# EAGLE board board (EAGLE 9.6.2)
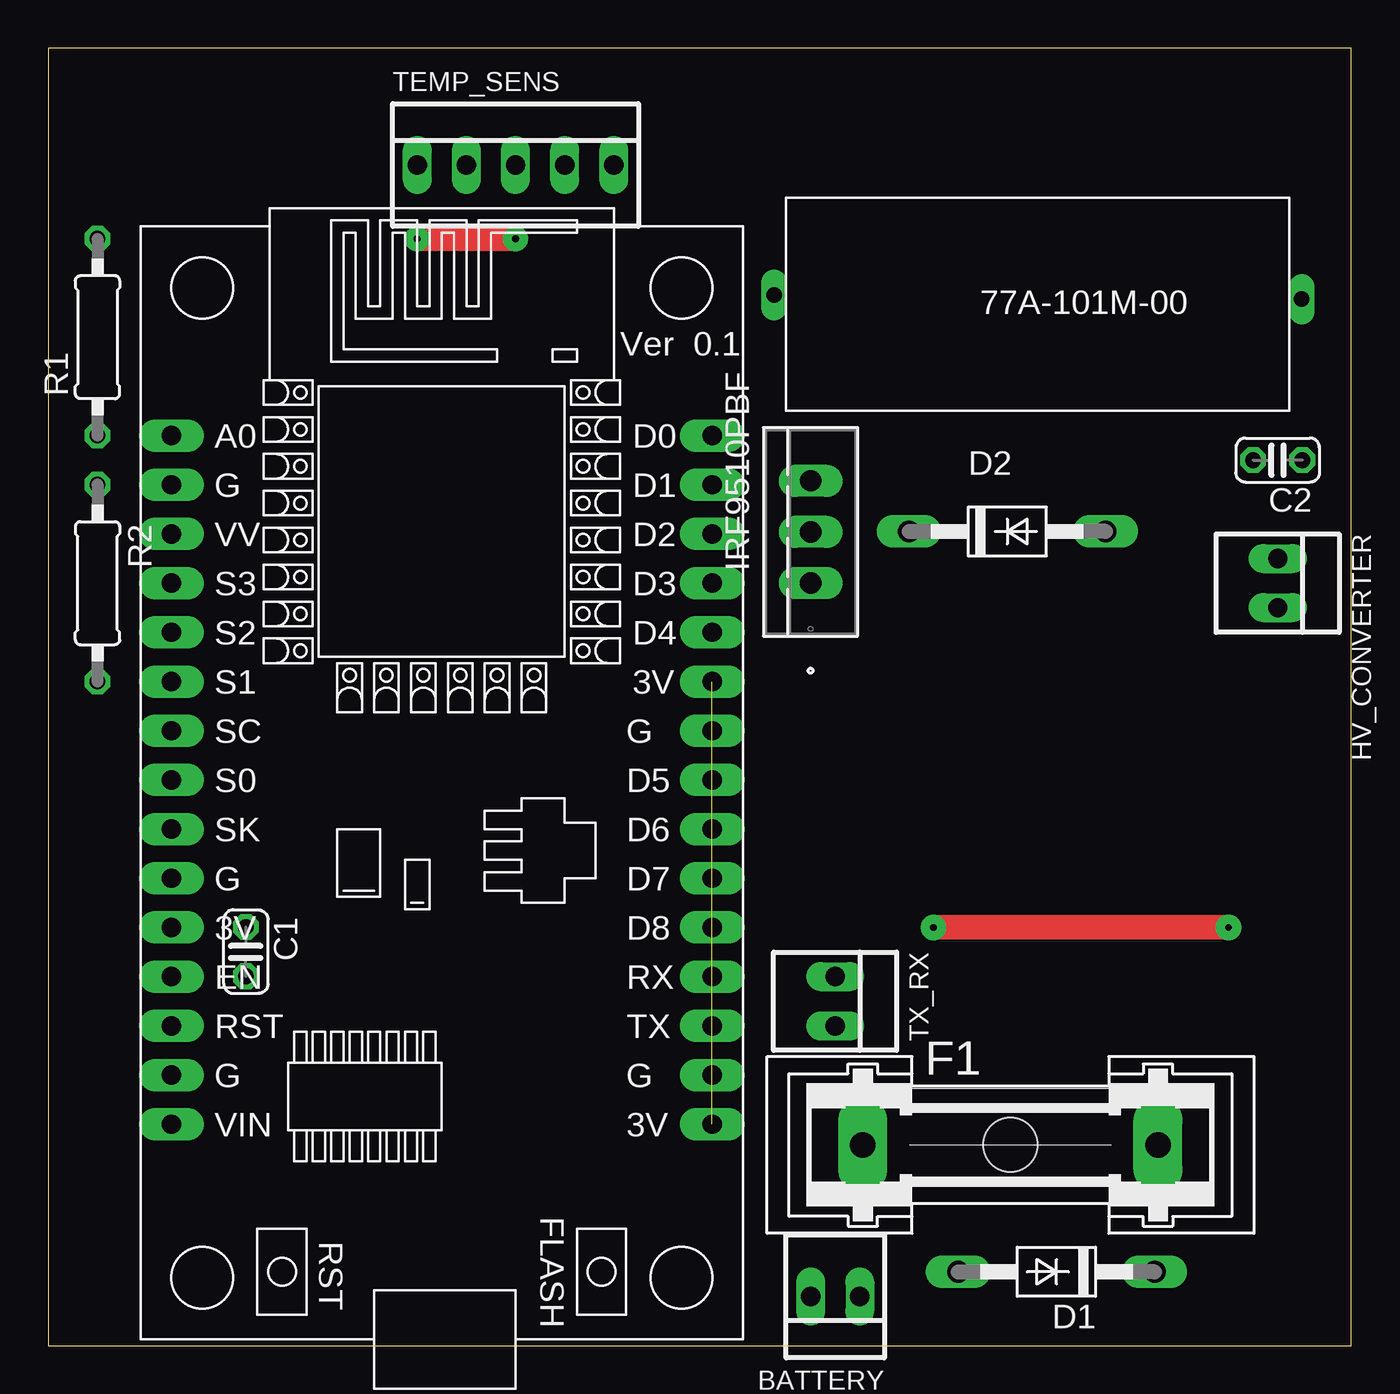
[diagram p0: board, top side]
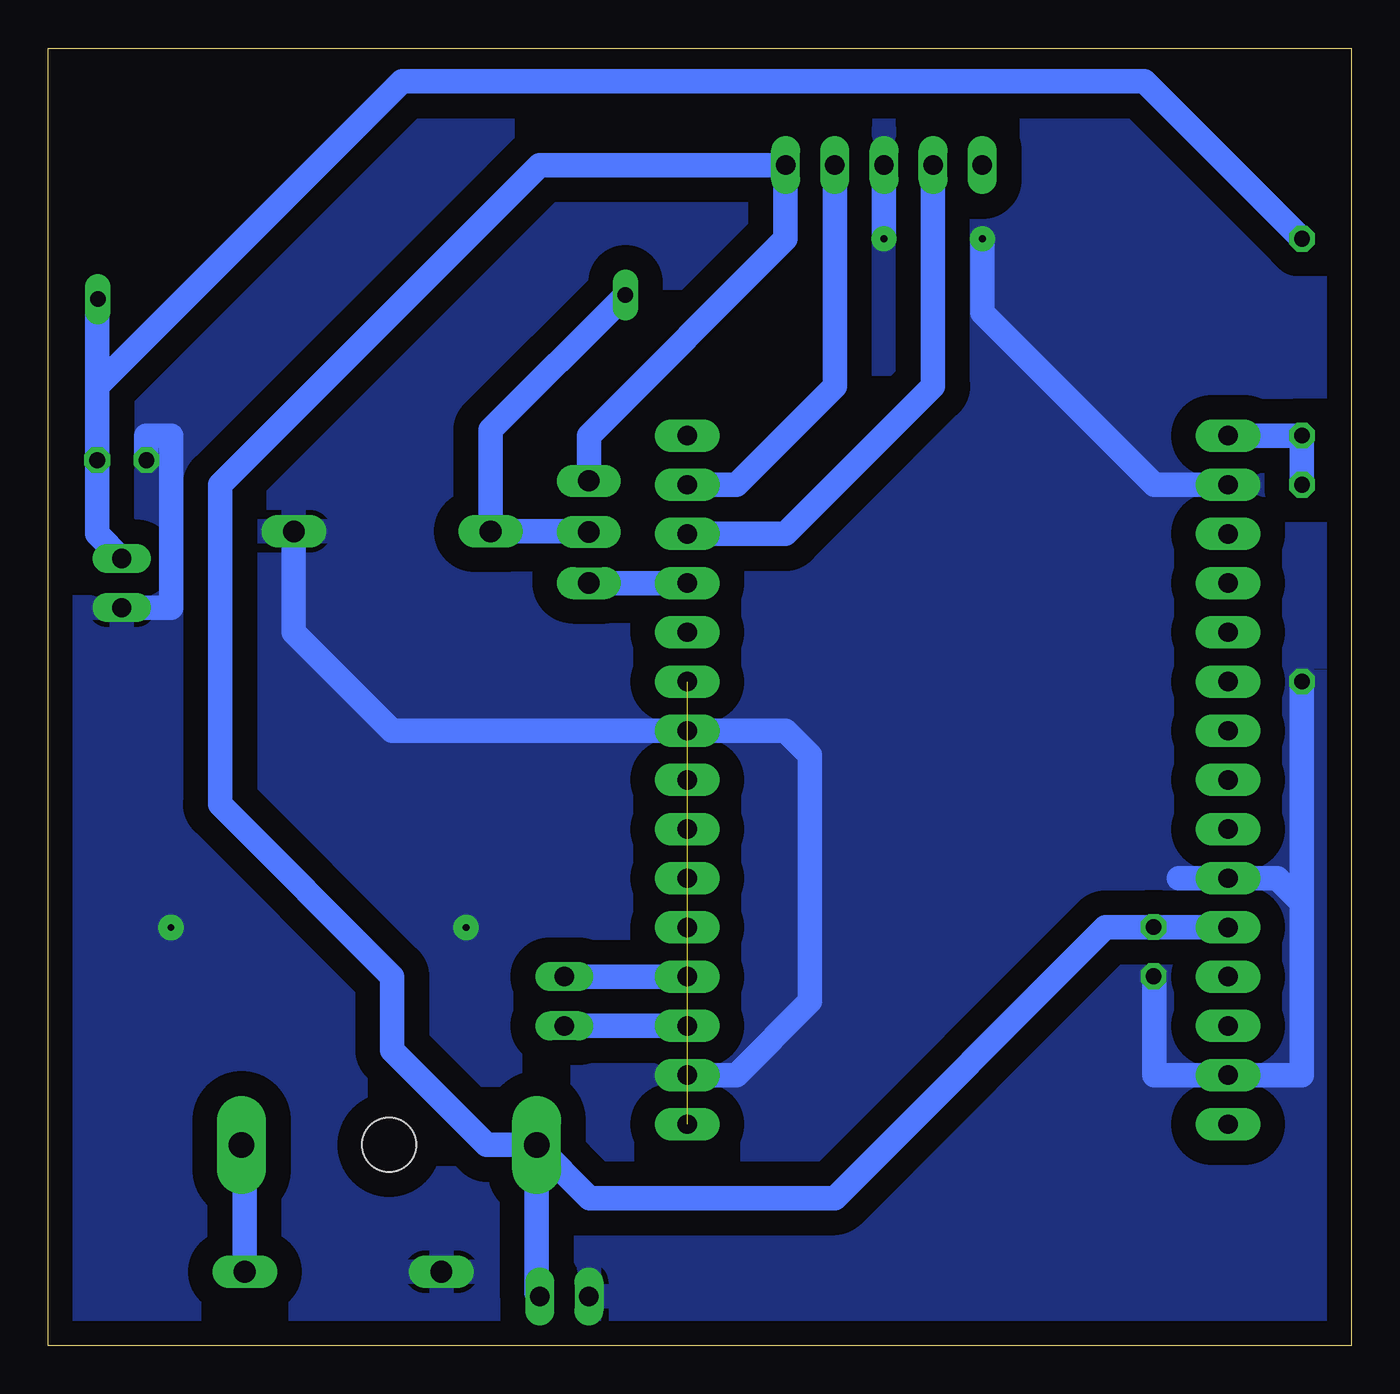
[diagram p1: board, bottom side, seen from below]

Size 67.29 x 66.98 mm. Coordinates in mm from the lower left corner, seen from the top.
Outline: 0,0 67.29,0 67.29,66.98 0,66.98 0,0
Copper layers (1*16): Top 0.035mm / dielectric 1.5mm / Bottom 0.035mm
Design rules "default": minimum track width 6mil, minimum drill 0.35mm, track to track 6mil, track to pad 6mil, pad to pad 6mil, via to via 6mil, smd to smd 6mil, copper to edge 40mil, drill to drill 6mil, minimum pad ring 10mil, minimum via ring 8mil, stop-mask expansion 4mil, vias tented up to drill 0mil, thermal gap 10mil

## Footprints (pad centres in the part's own frame; a part is rotated, then mirrored left to right if it is on the bottom)
22-23-2021 = drill 1 long: 1 -1.27,0; 2 1.27,0
C025-024X044 = drill 0.813 octagon: 1 -1.27,0; 2 1.27,0
LONGFOOTPRINT = drill 1.118 long: A 5.08,0; C -5.08,0
GSH15 = drill 1.321 pad 2.54 long: 1 -7.62,0; 2 7.62,0 | hole 2.794: 0,0
0207/10 = drill 0.813 octagon: 1 -5.08,0; 2 5.08,0
22-23-2051 = drill 1 long: 1 -5.08,0; 2 -2.54,0; 3 0,0; 4 2.54,0; 5 5.08,0
IRF9510PBF = drill 1.1 pad 1.6 long: 1 -2.54,0; 2 0.102,0; 3 2.743,0
NODEMCU = drill 1 pad 1.676 long: 1 -13.97,17.78; 2 -13.97,15.24; 3 -13.97,12.7; 4 -13.97,10.16; 5 -13.97,7.62; 6 -13.97,5.08; 7 -13.97,2.54; 8 -13.97,0; 9 -13.97,-2.54; 10 -13.97,-5.08; 11 -13.97,-7.62; 12 -13.97,-10.16; 13 -13.97,-12.7; 14 -13.97,-15.24; 15 -13.97,-17.78; 16 13.97,-17.78; 17 13.97,-15.24; 18 13.97,-12.7; 19 13.97,-10.16; 20 13.97,-7.62; 21 13.97,-5.08; 22 13.97,-2.54; 23 13.97,0; 24 13.97,2.54; 25 13.97,5.08; 26 13.97,7.62; 27 13.97,10.16; 28 13.97,12.7; 29 13.97,15.24; 30 13.97,17.78
77A-101M-00 = drill 0.8 long: 1 -0.61,5.98; 2 26.63,5.77

## Placement (x,y rotation side)
BATTERY  22-23-2021  [22-23-2021]  40.64,2.54 180 top
C1  [C025-024X044]  10.2,20.34 270 top
C2  [C025-024X044]  63.5,45.72 180 top
D1  1N4004LONGFOOTPRINT  [LONGFOOTPRINT]  52.07,3.81 180 top
D2  1N4004LONGFOOTPRINT  [LONGFOOTPRINT]  49.53,42.04 0 top
F1  [GSH15]  49.69,10.36 0 top
HV_CONVERTER  22-23-2021  [22-23-2021]  63.5,39.37 270 top
R1  [0207/10]  2.54,52.07 90 top
R2  [0207/10]  2.54,39.37 270 top
TEMP_SENS  22-23-2051  [22-23-2051]  24.13,60.96 0 top
TX_RX  22-23-2021  [22-23-2021]  40.64,17.78 270 top
U1  IRF9510PBFIRF95110PBF  [IRF9510PBF]  39.37,41.91 90 top
U$1  NODEMCU  [NODEMCU]  20.32,29.21 0 top
U$2  77A-101M-00  [77A-101M-00]  38.1,48.26 0 top

## Library data of the parts
BATTERY HV_CONVERTER TX_RX = con-molex; MF: MOLEX; MPN: 22-23-2021; OC_FARNELL: 1462926; OC_NEWARK: 25C3832
C1 C2 = rcl; SPICEPREFIX: C
D1 D2 = 1N4004longfootprint
F1 = fuse; MPN: 64900001039; OC_FARNELL: 1271673; OC_NEWARK: 02P0318
R1 R2 = rcl; SPICEPREFIX: R
TEMP_SENS = con-molex; MF: MOLEX; MPN: 22-23-2051; OC_FARNELL: 1462952; OC_NEWARK: 38C9178
U1 = IRF9510
U$1 = nodemcu
U$2 = 77A-101M-00

## Nets
3V: U$1.16 U$1.25
GND: BATTERY.2 C1.2 C2.2 D1.A D2.A HV_CONVERTER.2 R2.2 TEMP_SENS.3 U$1.2 U$1.10 U$1.14 U$1.17 U$1.24
N$1: D1.C F1.2
N$2: D2.C U1.2 U$2.1
N$3: TX_RX.1 U$1.19
N$4: TX_RX.2 U$1.18
N$5: R1.1 R2.1 U$1.1
PWM: U1.1 U$1.27
REG_OUT: C2.1 HV_CONVERTER.1 R1.2 U$2.2
SCLK: TEMP_SENS.4 U$1.29
SDA: TEMP_SENS.2 U$1.28
V_BATT: BATTERY.1 C1.1 F1.1 TEMP_SENS.5 U1.3 U$1.11

## Tracks (layer width: path | path; a pad name or v marks a point on that pad's centre or on a via)
3V  (1 unrouted)
GND  (via drill 0.35 pad 1.3)
  Top 1.27: v45.72,21.59 v60.96,21.59 | v19.05,57.15 v24.13,57.15
  Bottom 1.27: U$1.17 31.75,13.97 27.94,17.78 27.94,30.48 29.21,31.75 U$1.24 49.53,31.75 54.61,36.83 D2.A | v24.13,57.15 TEMP_SENS.3 | 8.89,24.13 U$1.10 3.81,24.13 2.54,22.86 | C1.2 10.16,19.03 10.16,13.97 U$1.14 | U$1.14 3.81,13.97 | U$1.14 2.54,13.97 2.54,22.86 | 2.54,22.86 R2.2 | U$1.2 10.16,44.45 19.05,53.34 v19.05,57.15 | C2.2 62.23,46.99 60.96,46.99 60.96,38.1 HV_CONVERTER.2
  pour Bottom (isolate 1.27): 0,0 0,67.31 67.31,67.31 67.31,0
N$1
  Bottom 1.27: D1.C 57.15,10.2 F1.2
N$2
  Bottom 1.27: U1.2 39.4,42.04 D2.C 44.45,47.28 U$2.1
N$3
  Bottom 1.27: TX_RX.1 U$1.19
N$4
  Bottom 1.27: TX_RX.2 U$1.18
N$5
  Bottom 1.27: R2.1 R1.1 U$1.1
PWM
  Bottom 1.27: U1.1 U$1.27
REG_OUT
  Bottom 1.27: U$2.2 64.77,53.99 64.77,49.53 | 64.77,49.53 C2.1 64.77,41.91 HV_CONVERTER.1 | R1.2 10.67,65.28 49.02,65.28 64.77,49.53
SCLK
  Bottom 1.27: U$1.29 31.75,44.45 26.67,49.53 TEMP_SENS.4
SDA
  Bottom 1.27: U$1.28 29.21,41.91 21.59,49.53 TEMP_SENS.2
V_BATT
  Bottom 1.27: F1.1 42.07,2.7 BATTERY.1 | C1.1 10.18,21.59 | 10.18,21.59 U$1.11 | F1.1 39.33,7.62 26.67,7.62 12.7,21.59 10.18,21.59 | U1.3 39.37,46.99 29.21,57.15 TEMP_SENS.5 41.91,60.96 58.42,44.45 58.42,27.94 49.53,19.05 49.53,15.24 44.65,10.36 F1.1